# Altium PCB PCB_altium.pcbdoc
Units mm, origin at the board's own origin, x right, y up, seen from the top; angles counter-clockwise.
Board outline 186.44 x 163.7 mm, 2 copper layers (Top Layer, Bottom Layer); 56 components, 35 nets, 185 pads, 0 vias.
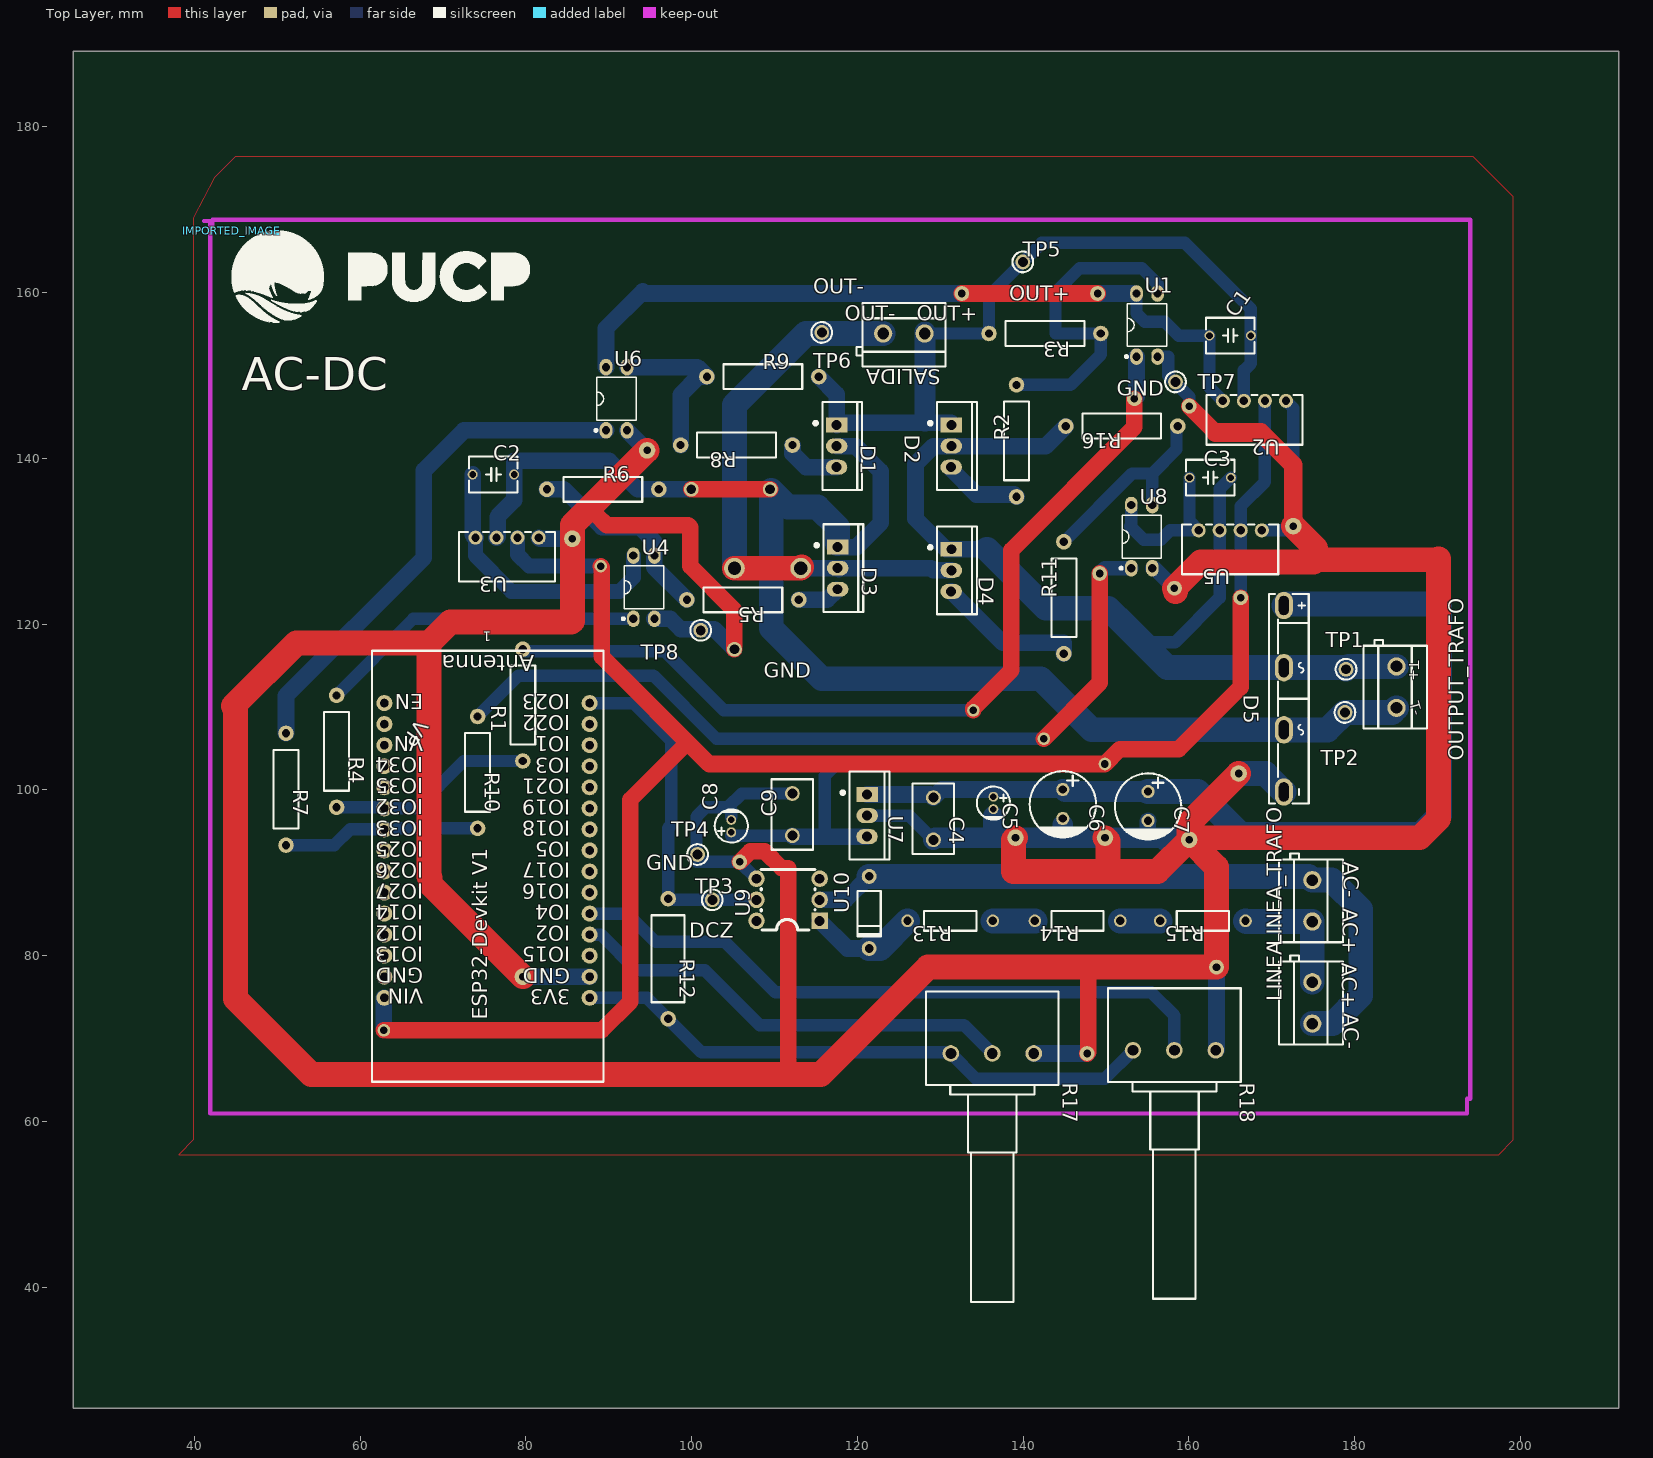
[diagram p0: Top Layer view]
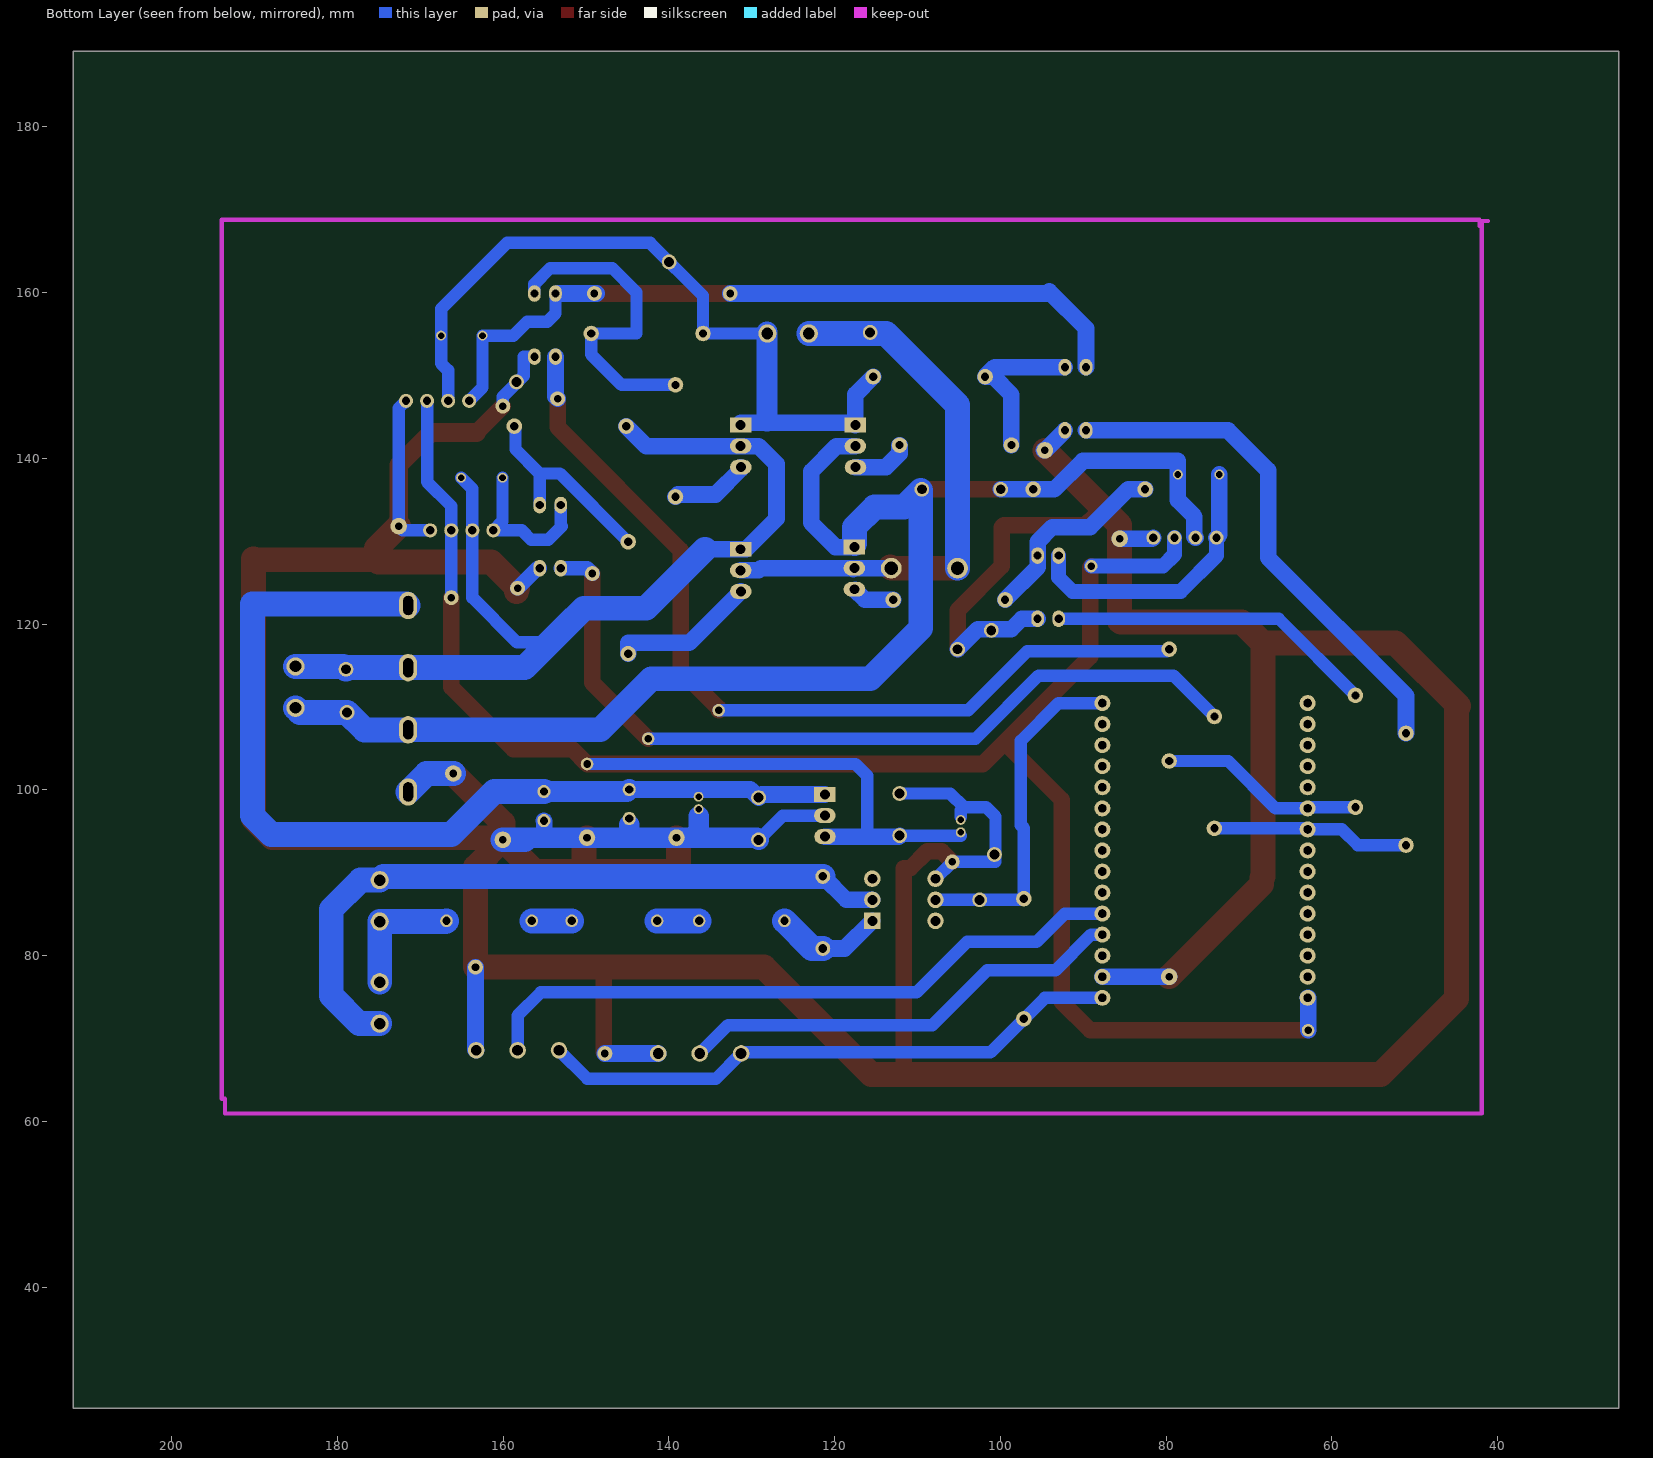
[diagram p1: Bottom Layer view, seen from below]

## Layer stack, top to bottom
Top Layer: signal copper (thickness not stored)
Dielectric: dielectric 0.32, FR-4, Dk 4.8
Bottom Layer: signal copper (thickness not stored)

## Board outline
211.836,25.4 25.4,25.4 25.4,189.103 211.836,189.103

## Components (designator, comment, footprint, x,y, rotation, side; value= is the part's Value field where it differs from the comment)
1 "ESP32 (DEVKITV1) CED" ESP32-DEVKITV1_ESP32-DEVKITV1 82.423,93.345 r0 top
C1 "4.7uF" CAP-TH_L5.5-W4.0-P5.0-D0.5 164.973,154.813 r0 top
C2 "4.7uF" CAP-TH_L5.5-W4.0-P5.0-D0.5 76.073,138.049 r0 top
C3 "4.7uF" CAP-TH_L5.5-W4.0-P5.0-D0.5 162.56,137.668 r0 top
C4 "100nF" CAP-TH_L8.5-W5.0-P5.00-D1.2 129.159,96.52 r270 top
C5 "330nF" CAP-TH_BD4.0-P1.50-D0.8-FD 136.398,98.425 r270 top
C6 "470uF" CAP-TH_BD8.0-P3.50-D0.6-FD 144.78,98.298 r270 top
C7 "470uF" CAP-TH_BD8.0-P3.50-D0.6-FD 155.067,98.044 r270 top
C8 "100nF" CAP-TH_BD4.0-P1.50-D0.8-FD 104.775,95.631 r90 top
C9 "100nF" CAP-TH_L8.5-W5.0-P5.00-D1.2 112.141,97.028 r90 top
D1 "BT151-500R" TO-220-3_L10.0-W4.5-P2.54-L 117.475,141.478 r270 top
D2 "BT151-500R" TO-220-3_L10.0-W4.5-P2.54-L 131.318,141.478 r270 top
D3 "BT151-500R" TO-220-3_L10.0-W4.5-P2.54-L 117.602,126.746 r270 top
D4 "BT151-500R" TO-220-3_L10.0-W4.5-P2.54-L 131.318,126.492 r270 top
D5 "KBJ1010" DXSBXX_4P-L25.0-W4.6-P7.50-L 171.45,110.998 r270 top
IMPORTED_IMAGE "IMPORTED_IMAGE" IMPORTED_IMAGE 44.484,167.474 r0 top
LINEA "220VAC" CONN-TH_P5.00_KF301-5.0-2P 174.879,74.295 r90 top
LINEA_TRAFO "220VAC" CONN-TH_P5.00_KF301-5.0-2P 174.879,86.614 r90 top
OUTPUT_TRAFO "15VAC" CONN-TH_P5.00_KF301-5.0-2P 185.039,112.395 r90 top
R1 "750" RES-TH_BD3.0-L9.5-P13.50-D0.6 79.629,110.236 r270 top
R2 "750" RES-TH_BD3.0-L9.5-P13.50-D0.6 139.192,142.113 r90 top
R3 "750" RES-TH_BD3.0-L9.5-P13.50-D0.6 142.621,155.067 r180 top
R4 "750" RES-TH_BD3.0-L9.5-P13.50-D0.6 57.15,104.648 r270 top
R5 "750" RES-TH_BD3.0-L9.5-P13.50-D0.6 106.172,122.936 r180 top
R6 "750" RES-TH_BD3.0-L9.5-P13.50-D0.6 89.281,136.271 r0 top
R7 "750" RES-TH_BD3.0-L9.5-P13.50-D0.6 51.054,100.076 r270 top
R8 "750" RES-TH_BD3.0-L9.5-P13.50-D0.6 105.41,141.605 r180 top
R9 "750" RES-TH_BD3.0-L9.5-P13.50-D0.6 108.585,149.86 r0 top
R10 "750" RES-TH_BD3.0-L9.5-P13.50-D0.6 74.168,102.108 r270 top
R11 "750" RES-TH_BD3.0-L9.5-P13.50-D0.6 144.907,123.19 r90 top
R12 "8.2kΩ" RES-TH_BD4.0-L10.5-P14.50-D0.6 97.155,79.629 r270 top
R13 "2.2kΩ" RES-TH_BD2.4-L6.3-P10.30-D0.6 131.191,84.201 r180 top
R14 "3.3kΩ" RES-TH_BD2.4-L6.3-P10.30-D0.6 146.558,84.201 r180 top
R15 "3.3kΩ" RES-TH_BD2.4-L6.3-P10.30-D0.6 161.671,84.201 r180 top
R16 "750" RES-TH_BD3.0-L9.5-P13.50-D0.6 151.892,143.891 r180 top
R17 "10kΩ" RES-ADJ-TH_RK1631110U1Q 136.271,68.199 r270 top
R18 "10kΩ" RES-ADJ-TH_RK1631110U1Q 158.242,68.58 r270 top
SALIDA "OUT" CONN-TH_P5.00_KF301-5.0-2P 125.603,155.067 r180 top
TP1 "TRAFO2" TESTPOINT_TH_BD2.5-D1.2 178.943,114.554 r0 top
TP2 "TRAFO1" TESTPOINT_TH_BD2.5-D1.2 178.816,109.347 r0 top
TP3 "DCZ" TESTPOINT_TH_BD2.5-D1.2 102.489,86.741 r0 top
TP4 "GND" TESTPOINT_TH_BD2.5-D1.2 100.711,92.202 r0 top
TP5 "OUT+" TESTPOINT_TH_BD2.5-D1.2 139.954,163.703 r0 top
TP6 "OUT-" TESTPOINT_TH_BD2.5-D1.2 115.697,155.194 r0 top
TP7 "GND" TESTPOINT_TH_BD2.5-D1.2 158.369,149.225 r0 top
TP8 "GND" TESTPOINT_TH_BD2.5-D1.2 101.092,119.253 r0 top
U1 "PC817B" DIP-4_L4.6-W6.5-P2.54-LS7.6-BL 154.94,156.083 r0 top
U2 "B0505S-1WR2_C5183118" PWRM-TH_B0505S-1WR3T 167.894,146.939 r180 top
U3 "B0505S-1WR2_C5183118" PWRM-TH_B0505S-1WR3T 77.724,130.429 r180 top
U4 "PC817B" DIP-4_L4.6-W6.5-P2.54-LS7.6-BL 94.234,124.46 r0 top
U5 "B0505S-1WR2_C5183118" PWRM-TH_B0505S-1WR3T 164.973,131.318 r180 top
U6 "PC817B" DIP-4_L4.6-W6.5-P2.54-LS7.6-BL 90.932,147.193 r0 top
U7 "LM7805T" TO-220-3_L10.1-W4.7-P2.54-L 121.158,96.901 r270 top
U8 "PC817B" DIP-4_L4.6-W6.5-P2.54-LS7.6-BL 154.305,130.556 r0 top
U9 "4N37" PDIP-6_L7.3-W6.5-P2.54-LS7.6-BL 111.633,86.741 r90 top
U10 "1N4007" DO-41_BD2.4-L4.7-P8.70-D0.8-RD 121.412,85.217 r90 top

## Footprints (in the part's own frame and the unit in brackets; to place one, negate y for a bottom-side part, rotate by r counter-clockwise, add the part's x,y. Pads: shape width x height; smd on the part's side, far side on the other; paste and mask are expansions set on the pad)
CAP-TH_BD4.0-P1.50-D0.8-FD [mm]
  round 1.2 hole 0.8 paste+0 mask+0.051: 1(-0.75,0) 2(0.75,0)
  silkscreen extent -1.98,-2 2.06,2
CAP-TH_BD8.0-P3.50-D0.6-FD [mm]
  round 1.6 hole 1 paste+0 mask+0.051: 1(-1.75,0) 2(1.75,0)
  silkscreen extent -3.96,-4 4.04,4
CAP-TH_L5.5-W4.0-P5.0-D0.5 [mm]
  round 1.2 hole 0.8 paste+0 mask+0.05: 1(-2.5,0) 2(2.5,0)
  silkscreen extent -2.92,-2.16 2.92,2.16
CAP-TH_L8.5-W5.0-P5.00-D1.2 [mm]
  round 1.8 hole 1.2 paste+0 mask+0.051: 1(-2.54,0) 2(2.54,0)
  silkscreen extent -4.25,-2.5 4.25,2.5
CONN-TH_P5.00_KF301-5.0-2P [mm]
  round 2.2 hole 1.4 paste+0 mask+0.051: 1(-2.5,0) 2(2.5,0)
  silkscreen extent -5,-3.7 5.71,4
DIP-4_L4.6-W6.5-P2.54-LS7.6-BL [mm]
  oval 1.524x2 hole 1 paste+0 mask+0.051: 1(-1.27,-3.81) 2(1.27,-3.81) 3(1.27,3.81) 4(-1.27,3.81)
  silkscreen extent -2.63,-3.96 2.38,2.58
DO-41_BD2.4-L4.7-P8.70-D0.8-RD [mm]
  round 1.8 hole 1.05 paste+0 mask+0.051: 1(-4.35,0) 2(4.35,0)
  silkscreen extent -2.92,-1.4 2.6,1.4
DXSBXX_4P-L25.0-W4.6-P7.50-L [mm]
  oval 3.3x2.2 hole 1.2 slot 2.3 at 0 deg paste+0 mask+0.051: 1(-11.25,0) 2(-3.75,0) 3(3.75,0) 4(11.25,0)
  silkscreen extent -12.65,-1.8 12.65,3
ESP32-DEVKITV1_ESP32-DEVKITV1 [mil]
  round 76 hole 39.36 paste+0 mask+2: 3V3(207.32,-725.64) D2(207.32,-425.64) D4(207.32,-325.64) D5(207.32,-25.64) D12(-767.89,-425.64) D13(-767.89,-525.64) D14(-767.89,-325.64) D15(207.32,-525.64) D18(207.32,74.36) D19(207.32,174.36) D21(207.32,274.36) D22(207.32,574.36) D23(207.32,674.36) D25(-767.89,-25.64) D26(-767.89,-125.64) D27(-767.89,-225.64) D32(-767.89,174.36) D33(-767.89,74.36) D34(-767.89,374.36) D35(-767.89,274.36) EN(-767.89,674.36) GND(207.32,-625.64) GND2(-767.89,-625.64) RX0(207.32,374.36) RX2(207.32,-225.64) TX0(207.32,474.36) TX2(207.32,-125.64) VIN(-767.89,-725.64) VN(-767.89,474.36) VP(-767.89,574.36)
  silkscreen extent -826,-1124 273,923
IMPORTED_IMAGE [mm]
  silkscreen extent 0,-11.1 36,0
PDIP-6_L7.3-W6.5-P2.54-LS7.6-BL [mm]
  rect 2x2 hole 1.2 paste+0 mask+0.051: 1(-2.54,-3.81)
  round 2 hole 1.2 paste+0 mask+0.051: 2(0,-3.81) 3(2.54,-3.81) 4(2.54,3.81) 5(0,3.81) 6(-2.54,3.81)
  silkscreen extent -3.65,-3.25 3.65,3.25
PWRM-TH_B0505S-1WR3T [mm]
  round 1.7 hole 1 paste+0 mask+0.051: 1(-3.81,0) 2(-1.27,0) 3(1.27,0) 4(3.81,0)
  silkscreen extent -5.8,-0.7 5.8,5.3
RES-ADJ-TH_RK1631110U1Q [mm]
  round 2 hole 1.3 paste+0 mask+0.051: 1(0,-5) 2(0,0) 3(0,5)
  silkscreen extent -7.49,-8 29.97,8
RES-TH_BD2.4-L6.3-P10.30-D0.6 [mm]
  round 1.524 hole 1 paste+0 mask+0.051: 1(-5.15,0) 2(5.15,0)
  silkscreen extent -3.15,-1.2 3.15,1.2
RES-TH_BD3.0-L9.5-P13.50-D0.6 [mm]
  round 1.88 hole 1 paste+0 mask+0.051: 1(-6.75,0) 2(6.75,0)
  silkscreen extent -4.75,-1.5 4.75,1.5
RES-TH_BD4.0-L10.5-P14.50-D0.6 [mm]
  round 1.88 hole 1 paste+0 mask+0.051: 1(-7.25,0) 2(7.25,0)
  silkscreen extent -5.25,-2 5.25,2
TESTPOINT_TH_BD2.5-D1.2 [mm]
  round 1.8 hole 1.2 paste+0 mask+0.051: 1(0,0)
  silkscreen extent -1.25,-1.25 1.25,1.25
TO-220-3_L10.0-W4.5-P2.54-L [mm]
  rect 1.8x2.6 hole 1.2 paste+0 mask+0.051: 1(-2.54,0.005)
  oval 1.8x2.6 hole 1.2 paste+0 mask+0.051: 2(0,0.005) 3(2.54,-0.005)
  silkscreen extent -5.3,-2.73 5.3,3.09
TO-220-3_L10.1-W4.7-P2.54-L [mm]
  rect 1.8x2.6 hole 1.2 paste+0 mask+0.051: 1(-2.54,0.005)
  oval 1.8x2.6 hole 1.2 paste+0 mask+0.051: 2(0,0.005) 3(2.54,-0.005)
  silkscreen extent -5.3,-3.13 5.3,2.69

## Free pads (board coordinates)
  round 1.8 hole 1.2 paste+0 mask+0.051: 9(99.949,136.271) 10(105.156,116.967)
  round 2 hole 0.914 paste+0.102 mask+0.051: 11(79.629,77.454) 14(165.989,101.981) 15(160.02,93.98) 27(94.615,140.97) 29(85.598,130.302) 34(172.593,131.826) 35(149.865,94.234) 36(139.07,94.234)
  round 1.524 hole 0.914 paste+0.102 mask+0.051: 13(62.865,70.993) 16(149.86,103.124) 18(142.494,106.172) 19(133.985,109.601)
  round 2.5 hole 1.6 paste+0.102 mask+0.051: 20(105.156,126.746) 25(113.157,126.746)
  round 1.8 hole 0.914 paste+0.102 mask+0.051: 21(147.701,68.199) 22(163.322,78.613) 23(105.791,91.313) 30(132.588,159.893) 31(148.971,159.893) 32(160.02,146.304) 33(153.416,147.193) 37(166.243,123.19) 39(158.242,124.333) 40(149.225,126.111)
  round 1.5 hole 0.914 paste+0.102 mask+0.051: 24(89.027,127)
  round 1.8 hole 1.2 paste+0.102 mask+0.051: 26(109.474,136.271)

## Nets (pads, with @x,y where several pads share a name; then routed paths per layer and width w, separated by ;. In a path a pad name is that pad's centre, name@x,y a point inside that pad or via, vN(x,y) a via of type N, cw(c..) or ccw(c..) an arc to the next point about the centre after c; other vN are vias at no path point)
3.3V: 1.3V3 R12.2 R17.1 R18.1 | length 71
  Bottom Layer w1.5: 1.3V3 94.62,74.914 R12.2 101.208,68.326 131.143,68.326 R17.1 ; R17.1@131.271,68.199 134.319,65.151 149.813,65.151 R18.1@153.242,68.58
5V: 1.VIN C8.1 C9.1 pad.13 pad.16 pad.24 pad.37 U2.2 U3.2 U5.2 U7.3 | length 273.3
  Top Layer w2: pad.13 89.154,70.993 92.583,74.422 92.583,98.806 99.284,105.507 99.725,105.507 ; pad.24 89.154,126.873 89.154,124.206 89.154,116.078 102.108,103.124 pad.16 151.638,104.902 158.75,104.902 166.243,112.395 pad.37
  Bottom Layer w1.5: C8.1@104.775,94.488 C9.1 ; 115.993,94.361 116.078,94.446 116.078,101.727 117.475,103.124 pad.16 ; pad.37 U5.2 166.243,134.239 169.164,137.16 U2.2
  Bottom Layer w1.8: U3.2 78.994,128.397 80.391,127 pad.24
  Bottom Layer w2: pad.13 62.865,74.914 1.VIN ; C9.1 112.268,94.361 U7.3
5V_ISO1: C1.1 pad.30 pad.31 U1.4 U2.4 U6.4 | length 91.5
  Top Layer w2: pad.30 pad.31
  Bottom Layer w1.5: U1.4 153.67,157.48 154.686,156.464 157.099,156.464 158.75,154.813 C1.1 162.473,148.55 U2.4
  Bottom Layer w2: U6.4 89.662,155.702 94.107,160.147 94.361,159.893 pad.30 ; pad.31@148.717,159.893 U1.4@153.416,159.893
5V_ISO2: C2.1 U3.4 U4.4 | length 34.1
  Bottom Layer w1.8: U3.4 73.914,128.27 78.232,123.952 91.313,123.952 92.964,125.603 U4.4
  Bottom Layer w2: C2.1 73.573,130.77 U3.4
5V_ISO3: C3.1 U5.4 U8.4 | length 18.8
  Bottom Layer w1.5: U8.4 153.035,131.953 152.908,131.826 154.559,130.175 156.591,130.175 157.734,131.318 U5.4 160.06,132.421 C3.1
AC+: LINEA.2 LINEA_TRAFO.1 R15.1 | length 15.4
  Bottom Layer w3: R15.1 166.908,84.114 LINEA_TRAFO.1 LINEA.2
AC-: LINEA.1 LINEA_TRAFO.2 U9.2 U10.2 | length 85.8
  Bottom Layer w2: U9.2 118.586,86.741 U10.2
  Bottom Layer w3: U10.2 152.735,89.567 174.426,89.567 LINEA_TRAFO.2 177.206,89.113 180.721,85.598 180.721,75.184 177.333,71.796 LINEA.1
D2: 1.D2 R17.2 | length 54.5
  Bottom Layer w1.5: 1.D2 89.043,82.534 93.345,78.232 101.6,78.232 108.204,71.628 132.842,71.628 R17.2
D4: 1.D4 R18.2 | length 79.8
  Bottom Layer w1.5: 1.D4 92.217,85.075 95.631,81.661 104.013,81.661 110.109,75.565 155.448,75.565 158.242,72.771 R18.2
D5_1: C4.1 C5.1 C6.1 C7.1 D5.1 U7.1 | length 117.2
  Bottom Layer w2: U7.1 128.778,99.441 C4.1 130.147,100.048 C6.1
  Bottom Layer w2.5: C6.1 145.034,99.794 C7.1
  Bottom Layer w3: C7.1 161.064,99.794 166.243,94.615 187.96,94.615 190.246,96.901 190.246,122.428 171.63,122.428 D5.1
D32: 1.D32 R1.2 R4.2 | length 24.9
  Bottom Layer w1.5: R4.2@57.15,97.898 62.795,97.898 1.D32 ; 1.D32 66.787,97.775 72.498,103.486 R1.2@79.629,103.486
D33: 1.D33 R7.2 R10.2 | length 24
  Bottom Layer w1.5: R7.2 56.876,93.327 58.786,95.235 1.D33 ; 1.D33 63.043,95.358 R10.2@74.168,95.358
DCZ: 1.D23 R12.1 TP3.1 U9.5 | length 41.7
  Bottom Layer w1.5: 1.D23 92.979,110.475 97.536,105.918 97.536,95.758 97.155,95.377 R12.1 97.293,86.741 U9.5
G1: D2.3 R2.1 | length 9.5
  Bottom Layer w2: D2.3 131.313,138.689 134.366,135.636 138.919,135.636 R2.1@139.192,135.363
G2: D1.3 R8.1 | length 7
  Bottom Layer w2: R8.1@112.161,141.605 112.161,140.569 113.792,138.938 D1.3
G3: D4.3 R11.1 | length 17.5
  Bottom Layer w2: D4.3 137.536,117.729 144.907,117.729 R11.1
G4: D3.3 R5.1 | length 5.1
  Bottom Layer w2: R5.1@112.922,122.936 116.332,122.936 D3.3@117.513,124.117
GND: 1.GND C4.2 C5.2 C6.2 C7.2 C8.2 C9.2 D5.4 pad.10 pad.11 pad.14 pad.15 pad.21 pad.22 pad.23 pad.27 pad.29 pad.32 pad.34 pad.35 pad.36 pad.39 R17.3 R18.3 TP4.1 TP7.1 TP8.1 U1.2 U2.1 U3.1 U4.2 U5.1 U6.2 U7.2 U8.2 U9.4 | length 689.4
  Top Layer w2: 88.491,133.195 89.731,131.953 99.568,131.953 99.822,131.699 99.822,127 105.156,121.666 pad.10 ; pad.23 107.061,92.583 108.839,92.583 110.871,90.551 111.651,90.533 111.651,65.659 ; pad.21 147.846,68.344 147.846,78.613 ; pad.32 163.195,143.129
  Top Layer w2.25: 163.195,143.129 168.656,143.129 172.593,139.192 pad.34
  Top Layer w3: pad.11 68.453,88.63 68.453,89.408 68.326,89.535 68.326,117.729 ; pad.27 85.598,131.953 pad.29 85.598,120.396 85.471,120.269 70.866,120.269 68.326,117.729 ; pad.36 138.811,93.975 138.811,90.17 156.21,90.17 pad.15 ; pad.35 150.246,93.853 150.246,90.17 ; pad.39@158.369,123.952 158.369,124.206 pad.39 161.417,127.508 175.006,127.508 175.26,127.762 ; pad.14 160.02,96.012 pad.15 ; pad.34 175.26,129.159 175.26,127.762 ; 68.326,117.729 52.324,117.729 44.704,110.109 44.958,109.855 44.958,74.803 54.102,65.659 115.57,65.659 128.524,78.613 pad.22 163.322,90.678 pad.15 ; pad.15 160.274,94.234 187.833,94.234 190.119,96.52 190.119,127.889 189.992,127.762 175.26,127.762
  Bottom Layer w1.5: C8.2@104.775,96.733 104.775,97.536 104.394,97.917 ; U9.4 pad.23 100.584,91.313 100.584,96.774 101.727,97.917 104.394,97.917 ; C9.2 106.045,99.568 104.394,97.917 ; U7.2 126.238,96.901 C4.2 ; U1.2 157.48,152.273 157.48,149.987 160.02,147.447 pad.32 ; U5.1 172.085,131.318 pad.34 172.593,146.05 U2.1
  Bottom Layer w1.8: U8.2 155.829,126.746 pad.39
  Bottom Layer w2: pad.11 1.GND ; U3.1 81.661,130.302 pad.29 ; U6.2 pad.27 pad.27@94.742,140.97 ; U4.2 97.409,120.65 98.679,119.38 102.743,119.38 pad.10 ; R17.3@141.271,68.199 pad.21 ; 155,94.234 155,96.227 C7.2 ; R18.3@163.242,68.58 163.322,68.66 pad.22
  Bottom Layer w2.5: C4.2 129.413,94.234 pad.36 pad.35 159.766,94.234 pad.15@159.931,94.069 ; 136.398,96.822 136.418,94.234 ; C6.2@144.78,95.8 144.78,94.269 144.815,94.234
  Bottom Layer w3: 157.381,93.98 pad.15 ; pad.14 169.217,101.981 D5.4
OUT+: C1.2 D1.1 D2.1 R3.2 R9.2 SALIDA.1 TP5.1 U2.3 | length 92.7
  Bottom Layer w1.5: SALIDA.1 R3.2@135.871,155.067 ; R3.2@135.87,155.067 135.87,159.619 142.24,165.989 159.512,165.989 167.472,158.029 C1.2 ; U2.3 166.624,150.622 167.473,151.471 C1.2
  Bottom Layer w2: R9.2@115.335,149.86 117.48,147.715 D1.1 ; D1.1@117.475,144.272 D2.1@131.318,144.272
  Bottom Layer w2.5: 128.143,144.471 SALIDA.1@128.143,155.249
OUT-: D3.2 D4.2 pad.20 pad.25 SALIDA.2 TP6.1 | length 68
  Top Layer w3: pad.20 pad.25 pad.25@113.284,126.873
  Bottom Layer w2: pad.25@113.284,126.873 113.411,126.746 D3.2 ; D4.2 129.159,126.492 128.905,126.746 D3.2 ; D3.2 117.746,126.608 D3.2
  Bottom Layer w3: pad.20 105.156,146.431 113.792,155.067 SALIDA.2
R1_1: pad.19 pad.33 R1.1 U1.1 | length 108.2
  Top Layer w2: pad.19 133.985,109.855 138.557,114.427 138.557,128.905 153.416,143.764 pad.33
  Bottom Layer w1.5: R1.1 79.903,116.713 96.774,116.713 103.886,109.601 pad.19
  Bottom Layer w2: pad.33 153.67,147.447 U1.1
R6_1: R5.2 R6.1 U4.3 | length 24.2
  Bottom Layer w2: R6.1@82.531,136.271 84.582,136.271 89.154,131.699 93.726,131.699 95.504,129.921 U4.3 95.504,126.854 R5.2@99.422,122.936
R7_1: R7.1 U6.1 | length 62.6
  Bottom Layer w2: R7.1@51.054,106.826 51.054,111.379 67.691,128.016 67.691,138.557 72.517,143.383 U6.1
R13_2: R13.2 U9.1 U10.1 | length 13.4
  Bottom Layer w2: U9.1 118.778,80.866 U10.1
  Bottom Layer w3: U10.1 122.707,80.866 R13.2
R14_2: R13.1 R14.2 | length 5.1
  Bottom Layer w3: R13.1 R14.2
R15_2: R14.1 R15.2 | length 4.8
  Bottom Layer w3: R14.1 R15.2
R16_1: R11.2 R16.1 U8.3 | length 24.9
  Bottom Layer w1.5: R11.2@144.907,129.94 153.143,138.176 155.575,138.176 ; U8.3 155.575,138.176 ; R16.1@158.642,143.891 158.496,143.745 158.496,141.097 155.575,138.176
S$12988: 
S$12995: 
TRAFO_1: C3.2 D2.2 D4.1 D5.2 OUTPUT_TRAFO.2 R16.2 TP1.1 U5.3 | length 119
  Bottom Layer w1.5: 154.358,117.803 158.316,117.803 163.703,123.19 U5.3 163.703,136.311 C3.2
  Bottom Layer w2: 135.636,129.032 D4.1 130.683,129.032 127,132.715 127,139.319 129.159,141.478 D2.2 142.729,141.478 R16.2@145.142,143.891
  Bottom Layer w3: 135.636,129.032 142.748,121.92 150.241,121.92 152.4,119.761 157.413,114.748 D5.2 178.749,114.748 TP1.1 179.284,114.895 OUTPUT_TRAFO.2
TRAFO_2: C2.2 D1.2 D3.1 D5.3 OUTPUT_TRAFO.1 pad.9 pad.26 R6.2 TP2.1 U3.3 | length 171.7
  Top Layer w2: pad.9 pad.26
  Bottom Layer w2: U3.3 76.581,130.556 76.581,132.969 78.573,134.961 C2.2 78.573,139.7 90.043,139.7 93.472,136.271 96.031,136.271 pad.9 ; D1.2 119.761,141.478 122.809,138.43 122.809,132.207 119.888,129.286 D3.1
  Bottom Layer w3: D3.1@117.607,129.749 117.607,131.694 115.189,134.112 111.633,134.112 109.601,136.144 109.601,119.507 115.697,113.411 142.113,113.411 148.275,107.249 D5.3 ; D5.3 176.717,107.248 TP2.1 184.491,109.347 OUTPUT_TRAFO.1
U1_3: R2.2 R3.1 U1.3 | length 40.1
  Bottom Layer w1.5: R2.2 145.689,148.864 149.372,152.547 149.372,155.067 143.891,155.067 143.891,160.02 146.812,162.941 154.305,162.941 156.21,161.036 U1.3
U4_1: R4.1 U4.1 | length 39.6
  Bottom Layer w1.5: R4.1@57.15,111.398 66.402,120.65 U4.1
U6_3: R8.2 R9.1 U6.3 | length 20.3
  Bottom Layer w2: U6.3 100.692,151.003 101.835,149.86 100.838,149.86 98.66,147.682 R8.2@98.66,141.605
U8_1: pad.18 pad.40 R10.1 U8.1 | length 100.3
  Top Layer w2: pad.18 149.225,112.903 pad.40
  Bottom Layer w1.5: R10.1@74.168,108.858 79.102,113.792 81.788,113.792 95.377,113.792 102.997,106.172 pad.18
  Bottom Layer w1.8: pad.40 149.86,126.746 U8.1
pads on no net: 1.D5 1.D12 1.D13 1.D14 1.D15 1.D18 1.D19 1.D21 1.D22 1.D25 1.D26 1.D27 1.D34 1.D35 1.EN 1.GND2 1.RX0 1.RX2 1.TX0 1.TX2 1.VN 1.VP U9.3 U9.6

## Polygon pours and split planes (outlines as drawn)
GND on Top Layer (solid): 39.878,169.037 39.878,57.785 38.1,56.007 197.358,56.007 199.136,57.785 199.136,171.577 194.31,176.403 44.958,176.403 42.418,173.863

## Silkscreen, mask and mechanical layers (free items; w line width, h text height)
Top Overlay:
  text "OUT-" at 114.681,159.882 h1.8
  text "OUT+" at 138.321,158.993 h1.8
  text "OUT-" at 118.491,156.58 h1.8
  text "OUT+" at 127.127,156.58 h1.8
  text "AC-DC" at 45.72,148.241 h4
  text "GND" at 151.257,147.563 h1.8
  text "T+" at 186.573,115.57 h1.25 r270
  text "GND" at 108.712,113.527 h1.8
  text "T-" at 186.597,110.445 h1.25 r286
  text "AC-" at 178.678,91.313 h1.8 r270
  text "GND" at 94.488,90.286 h1.8
  text "AC+" at 178.551,85.725 h1.8 r270
  text "DCZ" at 99.695,82.158 h1.8
  text "AC+" at 178.424,79.121 h1.8 r270
  text "AC-" at 178.678,73.025 h1.8 r270

## Text inside footprints (layer, text, board x,y; h text height)
1: Document "ESP32-DEVKITV1" at 93.102,94.107 h1.8 r90; Top Overlay "3V3" at 85.349,75.966 h1.8 r180; Top Overlay "GND" at 85.349,78.506 h1.8 r180; Top Overlay "IO15" at 85.349,81.046 h1.8 r180; Top Overlay "IO2" at 85.349,83.586 h1.8 r180; Top Overlay "IO4" at 85.349,86.126 h1.8 r180; Top Overlay "IO16" at 85.349,88.666 h1.8 r180; Top Overlay "IO17" at 85.349,91.206 h1.8 r180; Top Overlay "IO5" at 85.349,93.746 h1.8 r180; Top Overlay "IO18" at 85.349,96.286 h1.8 r180; Top Overlay "IO19" at 85.349,98.826 h1.8 r180; Top Overlay "IO21" at 85.349,101.366 h1.8 r180; Top Overlay "IO3" at 85.349,103.906 h1.8 r180; Top Overlay "IO1" at 85.349,106.446 h1.8 r180; Top Overlay "IO22" at 85.349,108.986 h1.8 r180; Top Overlay "IO23" at 85.349,111.526 h1.8 r180; Top Overlay "VIN" at 67.629,75.986 h1.8 r180; Top Overlay "GND" at 67.629,78.526 h1.8 r180; Top Overlay "IO13" at 67.629,81.066 h1.8 r180; Top Overlay "IO12" at 67.629,83.606 h1.8 r180; Top Overlay "IO14" at 67.629,86.146 h1.8 r180; Top Overlay "IO27" at 67.629,88.686 h1.8 r180; Top Overlay "IO26" at 67.629,91.226 h1.8 r180; Top Overlay "IO25" at 67.629,93.766 h1.8 r180; Top Overlay "IO33" at 67.629,96.306 h1.8 r180; Top Overlay "IO32" at 67.629,98.846 h1.8 r180; Top Overlay "IO35" at 67.629,101.386 h1.8 r180; Top Overlay "IO34" at 67.629,103.926 h1.8 r180; Top Overlay "VN" at 67.629,106.466 h1.8 r180; Top Overlay "VP" at 66.892,108.622 h1.8 r235; Top Overlay "EN" at 67.629,111.546 h1.8 r180; Top Overlay "ESP32-Devkit V1" at 75.322,72.263 h1.8 r90; Top Overlay "Antenna" at 81.007,116.275 h1.93 r180